# EAGLE board PowerBoard (EAGLE 7.4.0), part 1 of 2
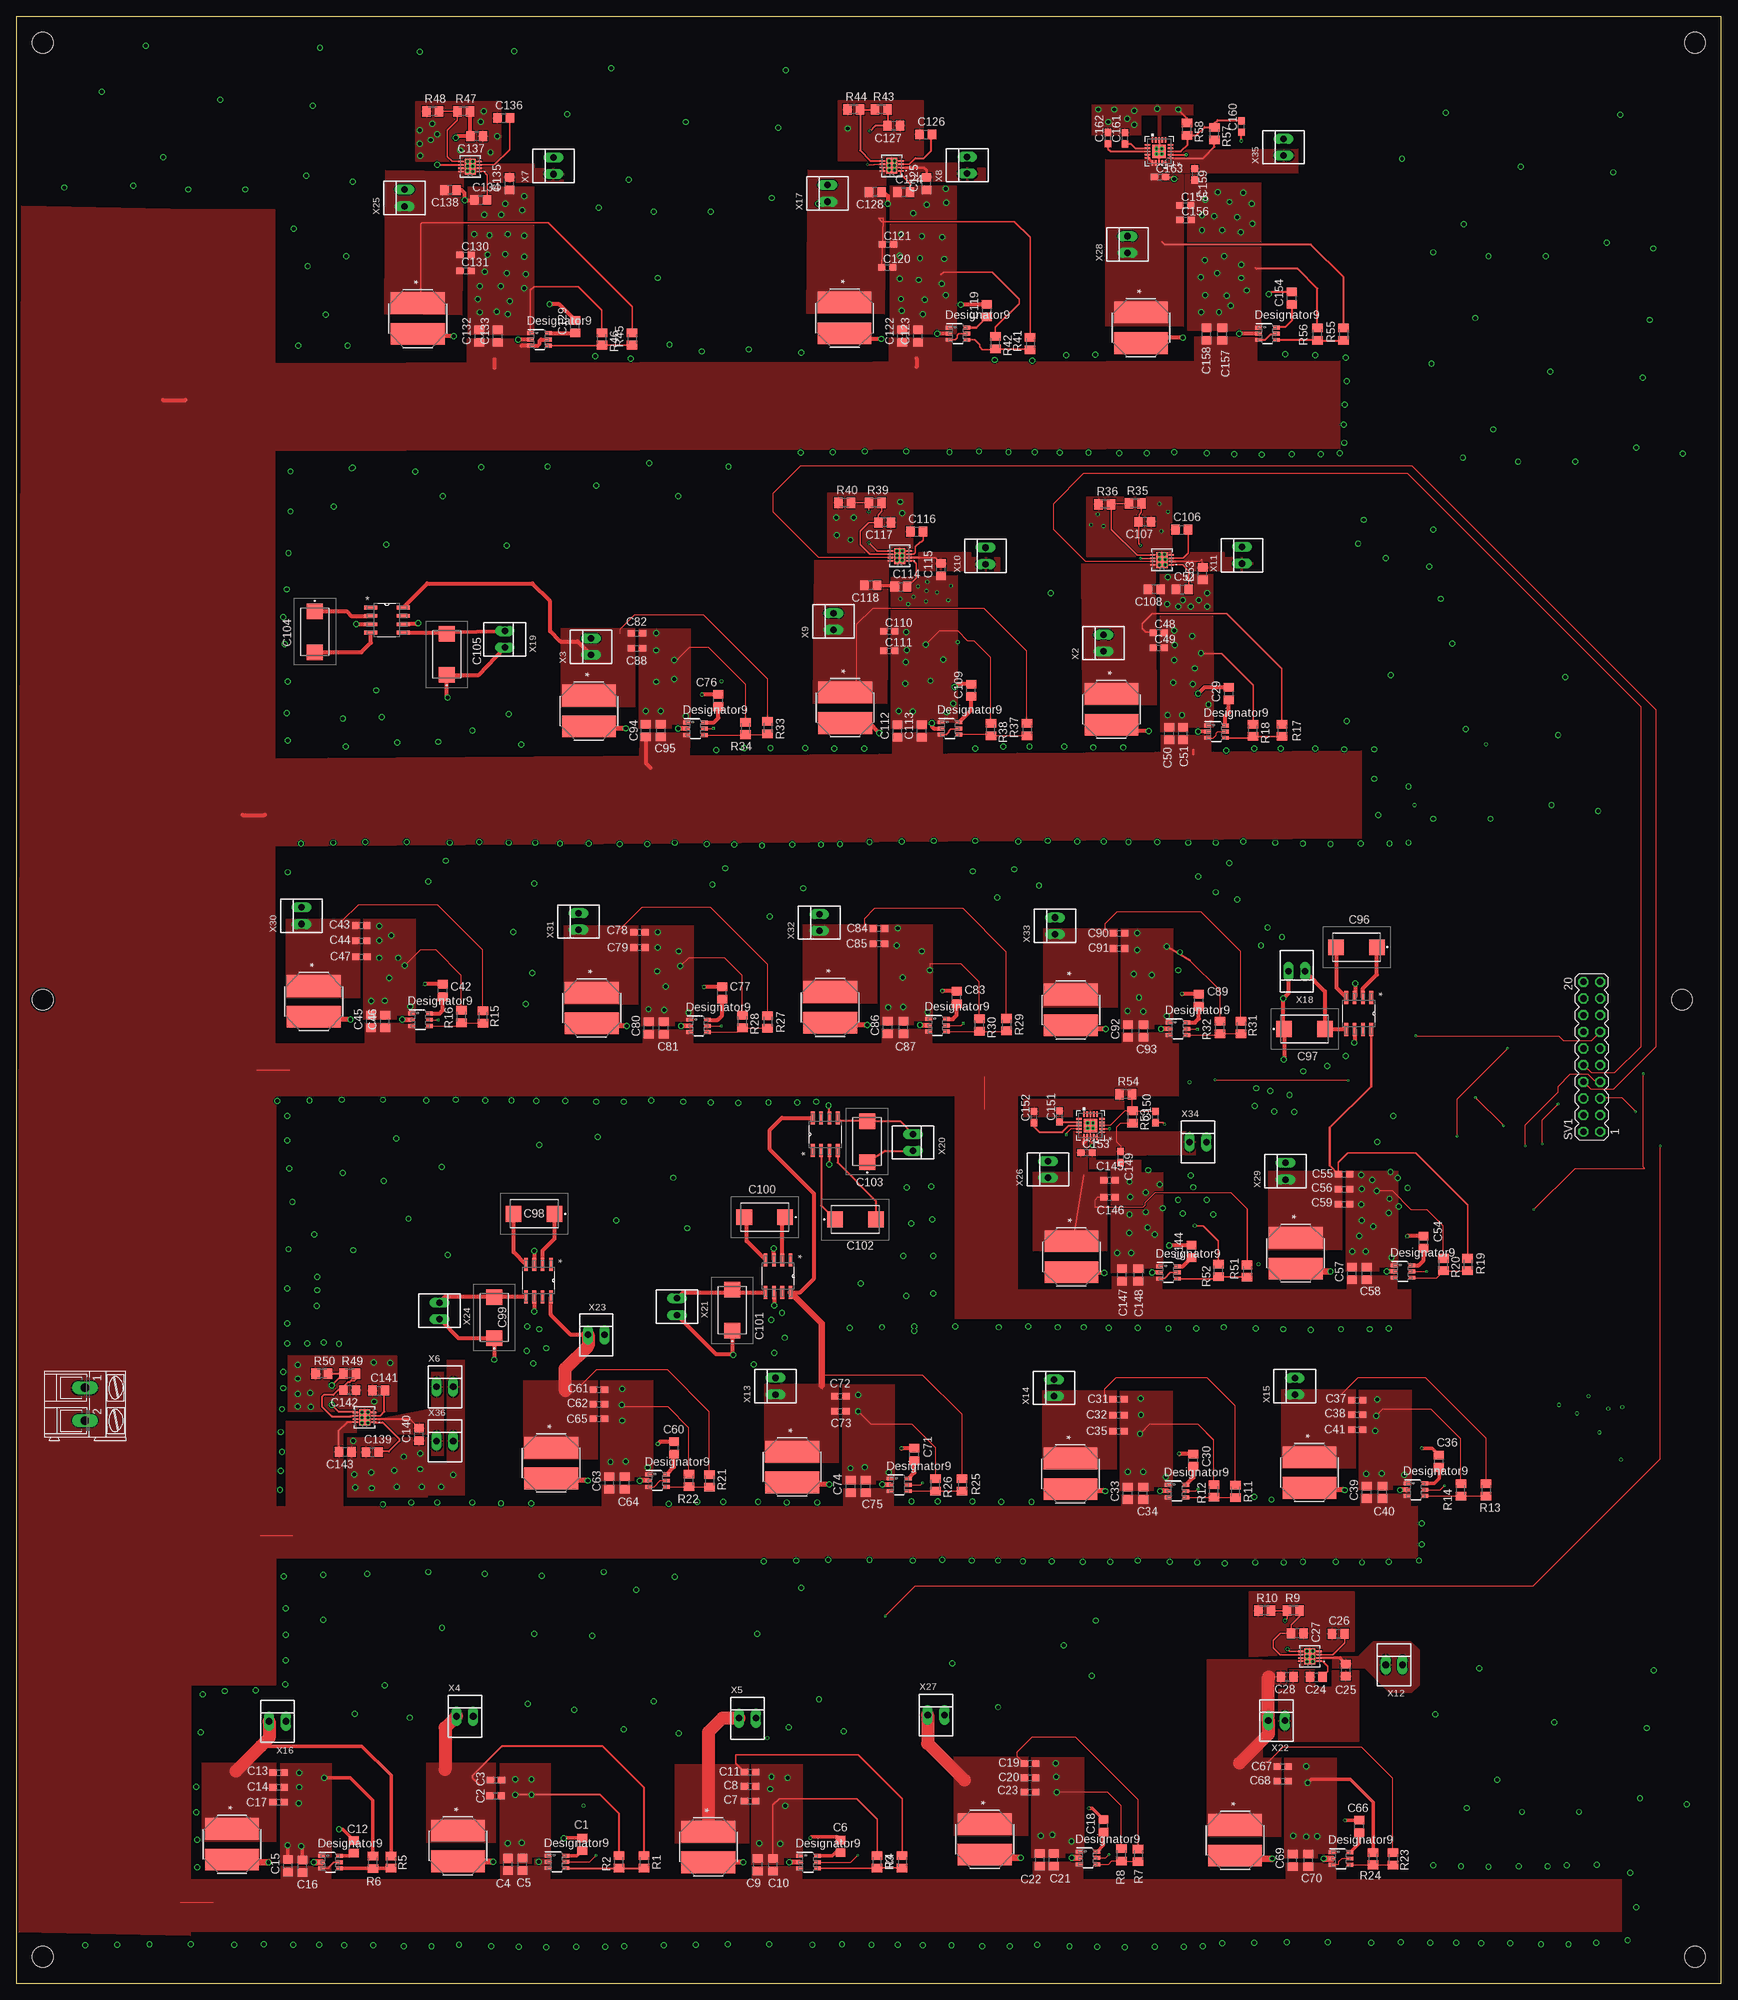
[diagram p0: board, top side]
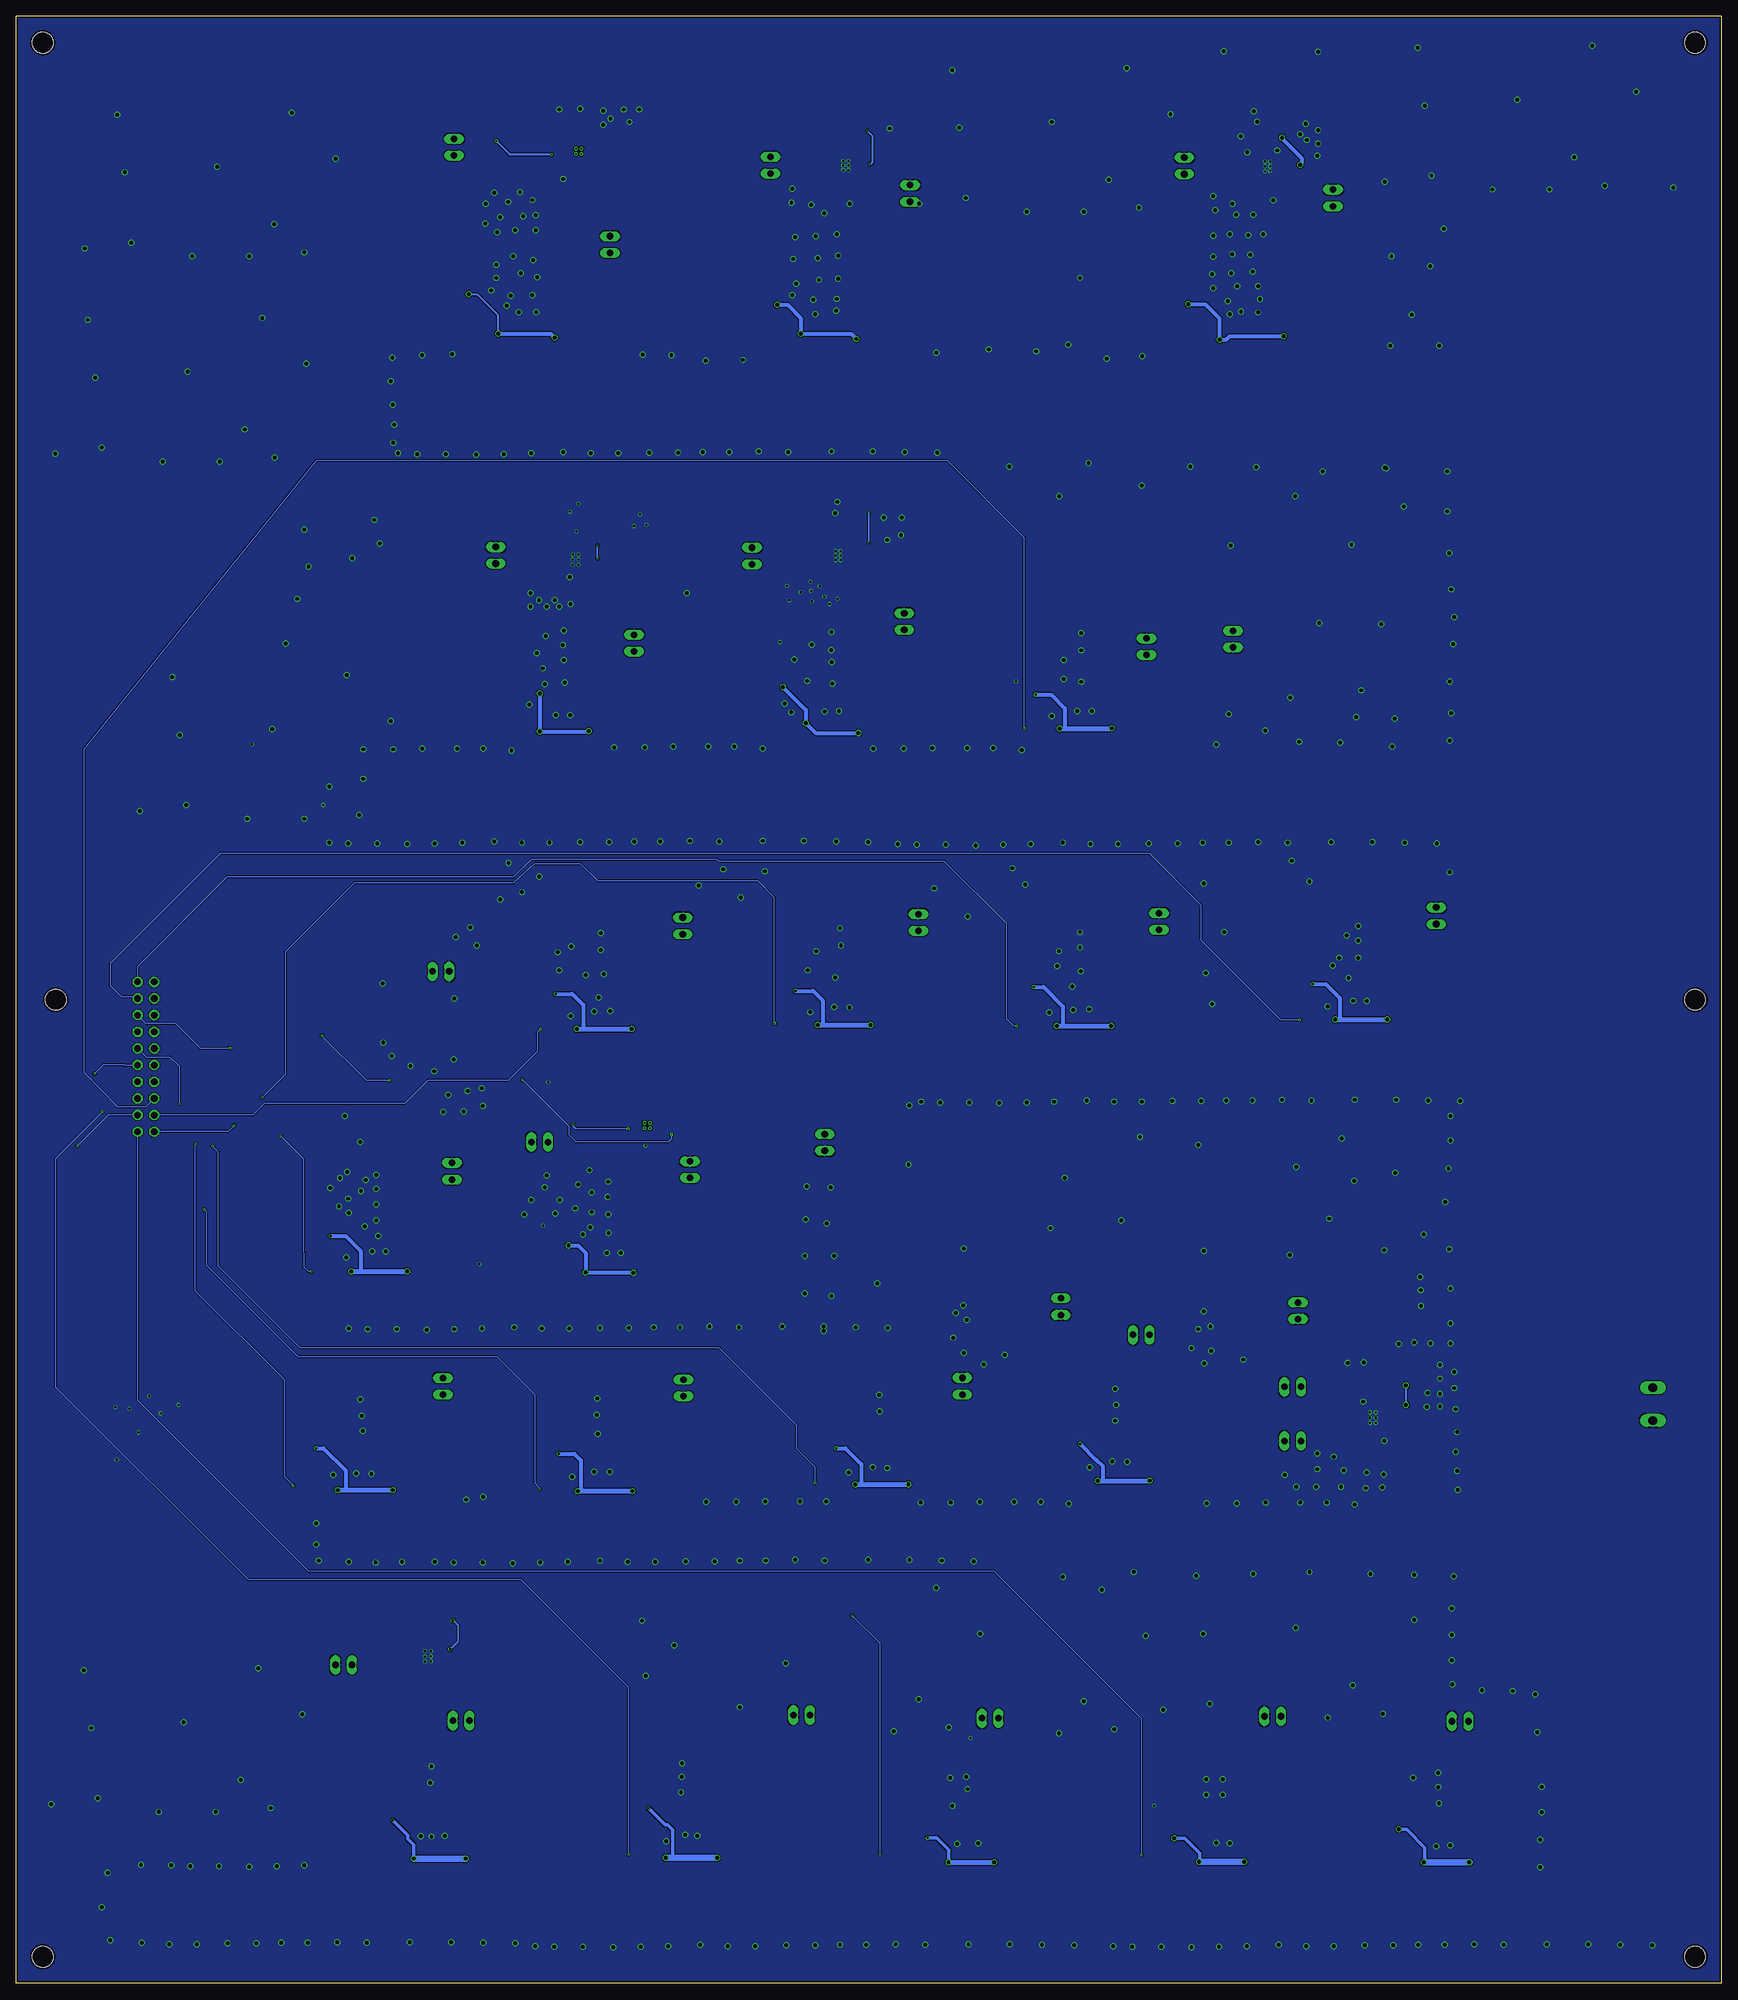
[diagram p1: board, bottom side, seen from below]

Size 260 x 300 mm. Coordinates in mm from the lower left corner, seen from the top.
Outline: 0,0 260,0 260,300 0,300 0,0
Copper layers (1*16): Top 0.035mm / dielectric 1.5mm / Bottom 0.035mm
Design rules "PCBWay_2L_100um-Track *": minimum track width 0.1mm, minimum drill 0.15mm, track to track 0.15mm, track to pad 0.15mm, pad to pad 0.15mm, via to via 0.15mm, smd to smd 0mil, copper to edge 0.3mm, drill to drill 10mil, minimum pad ring 6mil, minimum via ring 0.1mm, stop-mask expansion 2mil, vias tented up to drill 0.45mm, thermal gap 0.2mm
Holes 3.2 mm at 4,4 256,4 256,296 4,296 254,150 4,150

## Footprints (pad centres in the part's own frame; a part is rotated, then mirrored left to right if it is on the bottom)
C0805 = smd 1.3 x 1.5: 1 -0.95,0; 2 0.95,0
C0603 = smd 1.1 x 1: 1 -0.85,0; 2 0.85,0
T521W = smd 2.37 x 2.43: 1 -3.12,0; 2 3.12,0
M0805 = smd 1.3 x 1.6: 1 -0.95,0; 2 0.95,0
MA10-2 = drill 1.016 octagon: 1 -11.43,-1.27; 2 -11.43,1.27; 3 -8.89,-1.27; 4 -8.89,1.27; 5 -6.35,-1.27; 6 -6.35,1.27; 7 -3.81,-1.27; 8 -3.81,1.27; 9 -1.27,-1.27; 10 -1.27,1.27; 11 1.27,-1.27; 12 1.27,1.27; 13 3.81,-1.27; 14 3.81,1.27; 15 6.35,-1.27; 16 6.35,1.27; 17 8.89,-1.27; 18 8.89,1.27; 19 11.43,-1.27; 20 11.43,1.27
DDC0006A_N = smd 1 x 0.6: 1 -1.375,0.95; 2 -1.375,0; 3 -1.375,-0.95; 4 1.375,-0.95; 5 1.375,0; 6 1.375,0.95
CP_8_11_ADI = smd 0.805 x 0.249: 1 -1.402,0.75; 2 -1.402,0.25; 3 -1.402,-0.25; 4 -1.402,-0.75; 5 1.402,-0.75; 6 1.402,-0.25; 7 1.402,0.25; 8 1.402,0.75 | smd 1.7 x 2.44: 9 0,0
M08A = smd 1.981 x 0.559: 1 -2.464,1.905; 2 -2.464,0.635; 3 -2.464,-0.635; 4 -2.464,-1.905; 5 2.464,-1.905; 6 2.464,-0.635; 7 2.464,0.635; 8 2.464,1.905
RGR20_2P05X2P05_TEX = smd 0.85 x 0.28: 1 -1.725,1; 2 -1.725,0.5; 3 -1.725,0; 4 -1.725,-0.5; 5 -1.725,-1; 11 1.725,-1; 12 1.725,-0.5; 13 1.725,0; 14 1.725,0.5; 15 1.725,1 | smd 0.28 x 0.85: 6 -1,-1.725; 7 -0.5,-1.725; 8 0,-1.725; 9 0.5,-1.725; 10 1,-1.725; 16 1,1.725; 17 0.5,1.725; 18 0,1.725; 19 -0.5,1.725; 20 -1,1.725 | smd 2.05 x 2.05: 21 0,0 | drill 0.254 pad 0.508: V -0.406,-0.406; V_1 -0.406,0.406; V_2 0.406,-0.406; V_3 0.406,0.406
IND_VLP8040T-1R0N_TDK = smd 3.302 x 8.204: 1 -2.35,0; 2 2.35,0
AK300/2 = drill 1.321 long: 1 -2.515,0; 2 2.489,0
22-23-2021 = drill 1 long: 1 -1.27,0; 2 1.27,0

## Placement (x,y rotation side)
C1  0.1µF  [C0805]  86.28,21.19 90 top
C2  22µF  [C0603]  73.09,28.57 0 top
C3  22µF  [C0603]  73.14,30.97 0 top
C4  10µF  [C0805]  74.98,18.09 90 top
C5  10µF  [C0805]  77.18,18.14 90 top
C6  0.1µF  [C0805]  125.68,20.87 90 top
C7  22µF  [C0603]  111.89,27.77 0 top
C8  22µF  [C0603]  111.89,30.02 0 top
C9  10µF  [C0805]  113.08,18.04 90 top
C10  10µF  [C0805]  115.38,18.04 90 top
C11  22µF  [C0603]  111.89,32.17 0 top
C12  0.1µF  [C0805]  51.43,20.82 90 top
C13  22µF  [C0603]  39.99,32.12 0 top
C14  22µF  [C0603]  39.99,29.87 0 top
C15  10µF  [C0805]  41.43,17.89 90 top
C16  10µF  [C0805]  43.63,17.84 90 top
C17  22µF  [C0603]  39.99,27.62 0 top
C18  0.1µF  [C0805]  165.78,24.02 90 top
C19  22µF  [C0603]  154.59,33.52 0 top
C20  22µF  [C0603]  154.59,31.32 0 top
C21  10µF  [C0805]  158.18,18.84 90 top
C22  10µF  [C0805]  156.08,18.84 90 top
C23  22µF  [C0603]  154.59,29.12 0 top
C24  10µF  [C0805]  198.2,46.7 0 top
C25  10µF  [C0805]  202.75,47.75 90 top
C26  1µF  [C0805]  201.6,53.3 0 top
C27  1µF  [C0805]  195.35,53.35 180 top
C28  10µF  [C0805]  193.8,46.7 180 top
C29  0.1µF  [C0805]  184.9,196.7 90 top
C30  0.1µF  [C0805]  179.48,79.77 90 top
C31  22µF  [C0603]  168.09,89.07 0 top
C32  22µF  [C0603]  168.09,86.67 0 top
C33  10µF  [C0805]  169.48,74.74 90 top
C34  10µF  [C0805]  171.83,74.74 90 top
C35  22µF  [C0603]  168.09,84.22 0 top
C36  0.1µF  [C0805]  216.93,79.62 90 top
C37  22µF  [C0603]  204.49,88.92 0 top
C38  22µF  [C0603]  204.49,86.72 0 top
C39  10µF  [C0805]  205.93,74.89 90 top
C40  10µF  [C0805]  208.33,74.89 90 top
C41  22µF  [C0603]  204.49,84.42 0 top
C42  0.1µF  [C0805]  65.03,151.42 90 top
C43  22µF  [C0603]  52.59,161.32 0 top
C44  22µF  [C0603]  52.59,158.97 0 top
C45  10µF  [C0805]  54.08,146.69 90 top
C46  10µF  [C0805]  56.23,146.69 90 top
C47  22µF  [C0603]  52.62,156.57 0 top
C48  22µF  [C0603]  174.2,206 0 top
C49  22µF  [C0603]  174.2,203.7 0 top
C50  10µF  [C0805]  175.8,190.6 90 top
C51  10µF  [C0805]  177.9,190.6 90 top
C52  10µF  [C0805]  177.8,212.6 0 top
C53  10µF  [C0805]  180.9,215 90 top
C54  0.1µF  [C0805]  214.58,113.02 90 top
C55  22µF  [C0603]  202.47,123.37 0 top
C56  22µF  [C0603]  202.47,121.12 0 top
C57  10µF  [C0805]  203.68,108.24 90 top
C58  10µF  [C0805]  205.93,108.24 90 top
C59  22µF  [C0603]  202.47,118.82 0 top
C60  0.1µF  [C0805]  100.28,81.62 90 top
C61  22µF  [C0603]  88.82,90.52 0 top
C62  22µF  [C0603]  88.82,88.32 0 top
C63  10µF  [C0805]  90.43,76.29 90 top
C64  10µF  [C0805]  92.78,76.29 90 top
C65  22µF  [C0603]  88.82,86.07 0 top
C66  0.1µF  [C0805]  204.78,23.92 90 top
C67  22µF  [C0603]  193.12,33.02 0 top
C68  22µF  [C0603]  193.12,30.82 0 top
C69  10µF  [C0805]  194.63,18.74 90 top
C70  10µF  [C0805]  197.03,18.74 90 top
C71  0.1µF  [C0805]  136.93,80.62 90 top
C72  22µF  [C0603]  125.67,89.52 0 top
C73  22µF  [C0603]  125.67,87.27 0 top
C74  10µF  [C0805]  127.23,75.79 90 top
C75  10µF  [C0805]  129.53,75.79 90 top
C76  0.1µF  [C0805]  107.03,195.67 90 top
C77  0.1µF  [C0805]  107.63,151.02 90 top
C78  22µF  [C0603]  95.02,160.32 0 top
C79  22µF  [C0603]  95.02,157.97 0 top
C80  10µF  [C0805]  96.43,145.69 90 top
C81  10µF  [C0805]  98.73,145.69 90 top
C82  22µF  [C0603]  94.62,205.87 0 top
C83  0.1µF  [C0805]  143.38,150.37 90 top
C84  22µF  [C0603]  131.52,160.87 0 top
C85  22µF  [C0603]  131.52,158.57 0 top
C86  10µF  [C0805]  132.88,145.79 90 top
C87  10µF  [C0805]  135.28,145.79 90 top
C88  22µF  [C0603]  94.62,203.62 0 top
C89  0.1µF  [C0805]  180.33,149.92 90 top
C90  22µF  [C0603]  168.17,160.12 0 top
C91  22µF  [C0603]  168.17,157.82 0 top
C92  10µF  [C0805]  169.53,145.24 90 top
C93  10µF  [C0805]  171.88,145.24 90 top
C94  10µF  [C0805]  95.98,191.04 90 top
C95  10µF  [C0805]  98.28,191.04 90 top
C96  T521W476M020ATE045  [T521W]  204.37,158.01 180 top
C97  T521W476M020ATE045  [T521W]  196.44,145.54 0 top
C98  T521W476M020ATE045  [T521W]  78.95,117.36 180 top
C99  T521W476M020ATE045  [T521W]  72.88,101.52 90 top
C100  T521W476M020ATE045  [T521W]  114.12,116.83 180 top
C101  T521W476M020ATE045  [T521W]  109.18,102.64 90 top
C102  T521W476M020ATE045  [T521W]  127.95,116.47 0 top
C103  T521W476M020ATE045  [T521W]  129.73,128.36 90 top
C104  T521W476M020ATE045  [T521W]  45.52,206.13 270 top
C105  T521W476M020ATE045  [T521W]  65.63,202.68 90 top
C106  1µF  [C0805]  177.7,221.7 0 top
C107  1µF  [C0805]  172.1,222.9 180 top
C108  10µF  [C0805]  173.5,212.6 180 top
C109  0.1µF  [C0805]  145.6,197.2 90 top
C110  22µF  [C0603]  133.1,206.2 0 top
C111  22µF  [C0603]  133.1,203.2 0 top
C112  10µF  [C0805]  134.38,190.99 90 top
C113  10µF  [C0805]  138.06,190.99 90 top
C114  10µF  [C0805]  134.9,213 0 top
C115  10µF  [C0805]  141,215.6 90 top
C116  1µF  [C0805]  137.3,221.4 0 top
C117  1µF  [C0805]  132.4,222.8 180 top
C118  10µF  [C0805]  130.3,213.2 180 top
C119  0.1µF  [C0805]  148,255.1 90 top
C120  22µF  [C0603]  132.8,261.7 0 top
C121  22µF  [C0603]  132.9,265.2 0 top
C122  10µF  [C0805]  135.1,251.2 90 top
C123  10µF  [C0805]  137.5,251.2 90 top
C124  10µF  [C0805]  135.3,273.2 0 top
C125  10µF  [C0805]  138.8,274.5 90 top
C126  1µF  [C0805]  138.7,282 0 top
C127  1µF  [C0805]  133.8,283.3 180 top
C128  10µF  [C0805]  131,273.2 180 top
C129  0.1µF  [C0805]  85.2,252.7 90 top
C130  22µF  [C0603]  68.5,263.6 0 top
C131  22µF  [C0603]  68.5,261.2 0 top
C132  10µF  [C0805]  70.6,251.2 90 top
C133  10µF  [C0805]  73.4,251.2 90 top
C134  10µF  [C0805]  70.8,272 0 top
C135  10µF  [C0805]  75.2,274.5 90 top
C136  1µF  [C0805]  74.3,284.5 0 top
C137  1µF  [C0805]  70.2,281.7 180 top
C138  10µF  [C0805]  66.2,273.5 180 top
C139  10µF  [C0805]  54.3,81 0 top
C140  10µF  [C0805]  61.4,83.7 90 top
C141  1µF  [C0805]  55.27,90.39 0 top
C142  1µF  [C0805]  50.85,90.45 180 top
C143  10µF  [C0805]  50.18,81.01 180 top
C144  0.1µF  [C0805]  179.2,111.6 90 top
C145  22µF  [C0603]  166.7,122.5 0 top
C146  22µF  [C0603]  166.7,119.9 0 top
C147  10µF  [C0805]  168.6,108 90 top
C148  10µF  [C0805]  171.1,108 90 top
C149  22µF  [C0603]  168.4,126 270 top
C150  10nF  [C0603]  173.7,132.1 90 top
C151  10µF  [C0603]  159.1,132.2 90 top
C152  10nF  [C0603]  155.2,132.1 90 top
C153  10µF  [C0603]  163.2,126.7 0 top
C154  0.1µF  [C0805]  194.5,257 90 top
C155  22µF  [C0603]  178.25,271.15 0 top
C156  22µF  [C0603]  178.3,268.95 0 top
C157  10µF  [C0805]  183.9,251.5 90 top
C158  10µF  [C0805]  181.5,251.5 90 top
C159  22µF  [C0603]  179.7,275.9 270 top
C160  10nF  [C0603]  186.8,283.2 90 top
C161  10µF  [C0603]  169.05,281.4 90 top
C162  10nF  [C0603]  166.45,281.45 90 top
C163  10µF  [C0603]  174.4,275.5 0 top
R1  3.09k  [M0805]  95.73,18.52 90 top
R2  10k  [M0805]  91.92,18.48 270 top
R3  13.7k  [M0805]  135.08,18.52 90 top
R4  10k  [M0805]  131.27,18.51 270 top
R5  32.2k  [M0805]  57.13,18.47 90 top
R6  10k  [M0805]  54.37,18.44 270 top
R7  32.2k  [M0805]  171.08,19.52 90 top
R8  10k  [M0805]  168.52,19.57 270 top
R9  12k  [M0805]  194.75,56.8 0 top
R10  10k  [M0805]  190.35,56.8 0 top
R11  32.2k  [M0805]  185.88,75.02 90 top
R12  10k  [M0805]  182.62,75.07 270 top
R13  32.2k  [M0805]  224.13,75.22 90 top
R14  10k  [M0805]  220.27,75.25 270 top
R15  32.2k  [M0805]  71.13,147.37 90 top
R16  10k  [M0805]  67.87,147.43 270 top
R17  56.2k  [M0805]  193,191.1 90 top
R18  10k  [M0805]  188.6,191.1 270 top
R19  32.2k  [M0805]  221.33,109.59 90 top
R20  10k  [M0805]  217.62,109.59 270 top
R21  34.8k  [M0805]  105.68,76.64 90 top
R22  10k  [M0805]  102.57,76.67 270 top
R23  56.2k  [M0805]  209.93,18.94 90 top
R24  10k  [M0805]  206.92,19 270 top
R25  56.2k  [M0805]  144.23,75.99 90 top
R26  10k  [M0805]  140.17,76.03 270 top
R27  56.2k  [M0805]  114.58,146.64 90 top
R28  10k  [M0805]  110.72,146.71 270 top
R29  56.2k  [M0805]  150.98,146.19 90 top
R30  10k  [M0805]  146.87,146.14 270 top
R31  56.2k  [M0805]  186.73,145.79 90 top
R32  10k  [M0805]  183.57,145.77 270 top
R33  61.9k  [M0805]  114.58,191.49 90 top
R34  10k  [M0805]  111.22,191.4 270 top
R35  12k  [M0805]  170.6,225.7 0 top
R36  10k  [M0805]  166,225.6 0 top
R37  56.2k  [M0805]  154.1,191.2 90 top
R38  10k  [M0805]  148.6,191.2 270 top
R39  2k  [M0805]  131,225.8 0 top
R40  10k  [M0805]  126.3,225.8 0 top
R41  56.2k  [M0805]  154.6,250.1 90 top
R42  10k  [M0805]  149.3,250.2 270 top
R43  12k  [M0805]  131.9,285.8 0 top
R44  10k  [M0805]  127.7,285.8 0 top
R45  56.2k  [M0805]  93.9,250.8 90 top
R46  10k  [M0805]  89.3,250.8 270 top
R47  12k  [M0805]  68.2,285.5 0 top
R48  10k  [M0805]  63.5,285.5 0 top
R49  23.4k  [M0805]  50.85,92.95 0 top
R50  10k  [M0805]  46.6,92.95 0 top
R51  56.2k  [M0805]  187.7,108.6 90 top
R52  10k  [M0805]  183.3,108.7 270 top
R53  35.7k  [M0805]  170.2,132.1 270 top
R54  11.5k  [M0805]  169.2,135.6 0 top
R55  56.2k  [M0805]  202.4,251.5 90 top
R56  10k  [M0805]  198.4,251.5 270 top
R57  35.7k  [M0805]  182.7,282.1 270 top
R58  11.5k  [M0805]  178.5,282.8 270 top
SV1  [MA10-2]  240.25,141.3 90 top
U1  TPS562208DDCT  [DDC0006A_N]  82.42,18.5 0 top
U2  TPS562208DDCT  [DDC0006A_N]  120.79,18.45 0 top
U3  TPS562208DDCT  [DDC0006A_N]  47.91,18.45 0 top
U4  TPS562208DDCT  [DDC0006A_N]  163.43,19.1 0 top
U5  ADM7151ACPZ-04-R7  [CP_8_11_ADI]  197.25,49.85 180 top
U6  TPS562208DDCT  [DDC0006A_N]  176.97,75.05 0 top
U7  TPS562208DDCT  [DDC0006A_N]  213.44,75.25 0 top
U8  TPS562208DDCT  [DDC0006A_N]  61.63,146.95 0 top
U9  TPS562208DDCT  [DDC0006A_N]  183,190.9 0 top
U10  TPS562208DDCT  [DDC0006A_N]  211.47,108.55 0 top
U11  TPS562208DDCT  [DDC0006A_N]  97.79,76.65 0 top
U12  TPS562208DDCT  [DDC0006A_N]  202.01,19 0 top
U13  TPS562208DDCT  [DDC0006A_N]  134.63,76 0 top
U14  TPS562208DDCT  [DDC0006A_N]  104.05,146 0 top
U15  TPS562208DDCT  [DDC0006A_N]  140.47,146.1 0 top
U16  TPS562208DDCT  [DDC0006A_N]  177.14,145.55 0 top
U17  TPS562208DDCT  [DDC0006A_N]  103.58,191.35 0 top
U18  LM2662MX/NOPB  [M08A]  204.7,147.89 270 top
U19  LM2662MX/NOPB  [M08A]  79.6,107.17 270 top
U20  LM2662MX/NOPB  [M08A]  116.15,107.85 270 top
U21  LM2662MX/NOPB  [M08A]  123.34,129.48 90 top
U22  LM2662MX/NOPB  [M08A]  56.5,207.91 0 top
U23  ADM7151ACPZ-04-R7  [CP_8_11_ADI]  174.7,217.1 180 top
U24  TPS562208DDCT  [DDC0006A_N]  142.38,191.37 0 top
U25  ADM7151ACPZ-04-R7  [CP_8_11_ADI]  134.7,217.7 180 top
U26  TPS562208DDCT  [DDC0006A_N]  143.6,251.6 0 top
U27  ADM7151ACPZ-04-R7  [CP_8_11_ADI]  133.5,277.2 180 top
U28  TPS562208DDCT  [DDC0006A_N]  79.8,250.7 0 top
U29  ADM7151ACPZ-04-R7  [CP_8_11_ADI]  69.2,277.1 180 top
U30  ADM7151ACPZ-04-R7  [CP_8_11_ADI]  53.1,86.3 180 top
U31  TPS562208DDCT  [DDC0006A_N]  175.7,108.4 0 top
U32  TPS7A8300RGRR  [RGR20_2P05X2P05_TEX]  163.8,130.8 180 top
U33  TPS562208DDCT  [DDC0006A_N]  190.8,251.6 0 top
U34  TPS7A8300RGRR  [RGR20_2P05X2P05_TEX]  174.25,279.4 180 top
U$1  2.2µH  [IND_VLP8040T-1R0N_TDK]  67.33,20.94 270 top
U$2  2.2µH  [IND_VLP8040T-1R0N_TDK]  105.53,20.79 270 top
U$3  3.3µH  [IND_VLP8040T-1R0N_TDK]  32.88,21.19 270 top
U$4  3.3µH  [IND_VLP8040T-1R0N_TDK]  147.68,21.94 270 top
U$5  3.3µH  [IND_VLP8040T-1R0N_TDK]  167,194.3 270 top
U$6  3.3µH  [IND_VLP8040T-1R0N_TDK]  160.74,77.69 270 top
U$7  3.3µH  [IND_VLP8040T-1R0N_TDK]  197.19,77.89 270 top
U$8  3.3µH  [IND_VLP8040T-1R0N_TDK]  45.34,149.74 270 top
U$9  3.3µH  [IND_VLP8040T-1R0N_TDK]  126.38,194.55 270 top
U$10  3.3µH  [IND_VLP8040T-1R0N_TDK]  195.09,111.34 270 top
U$11  3.3µH  [IND_VLP8040T-1R0N_TDK]  81.55,79.34 270 top
U$12  3.3µH  [IND_VLP8040T-1R0N_TDK]  185.85,21.79 270 top
U$13  3.3µH  [IND_VLP8040T-1R0N_TDK]  118.3,78.74 270 top
U$14  3.3µH  [IND_VLP8040T-1R0N_TDK]  87.75,148.74 270 top
U$15  3.3µH  [IND_VLP8040T-1R0N_TDK]  124.1,148.84 270 top
U$16  3.3µH  [IND_VLP8040T-1R0N_TDK]  160.81,148.44 270 top
U$17  3.3µH  [IND_VLP8040T-1R0N_TDK]  87.31,194.04 270 top
U$18  3.3µH  [IND_VLP8040T-1R0N_TDK]  126.3,254 270 top
U$19  3.3µH  [IND_VLP8040T-1R0N_TDK]  61.2,253.9 270 top
U$20  3.3µH  [IND_VLP8040T-1R0N_TDK]  160.9,110.8 270 top
U$21  3.3µH  [IND_VLP8040T-1R0N_TDK]  171.5,252.5 270 top
X1  [AK300/2]  10.45,88.3 270 top
X2  22-23-2021  [22-23-2021]  165.8,204.4 90 top
X3  22-23-2021  [22-23-2021]  87.65,203.85 90 top
X4  22-23-2021  [22-23-2021]  68.4,40.7 0 top
X5  22-23-2021  [22-23-2021]  111.5,40.4 0 top
X6  22-23-2021  [22-23-2021]  65.35,90.95 0 top
X7  22-23-2021  [22-23-2021]  81.9,277.2 90 top
X8  22-23-2021  [22-23-2021]  145,277.3 90 top
X9  22-23-2021  [22-23-2021]  124.6,207.7 90 top
X10  22-23-2021  [22-23-2021]  147.8,217.7 90 top
X11  22-23-2021  [22-23-2021]  186.9,217.8 90 top
X12  22-23-2021  [22-23-2021]  210.1,48.55 0 top
X13  22-23-2021  [22-23-2021]  115.75,91.05 90 top
X14  22-23-2021  [22-23-2021]  158.26,90.79 90 top
X15  22-23-2021  [22-23-2021]  194.96,91.04 90 top
X16  22-23-2021  [22-23-2021]  39.82,39.93 0 top
X17  22-23-2021  [22-23-2021]  123.7,273 90 top
X18  22-23-2021  [22-23-2021]  195.26,154.32 180 top
X19  22-23-2021  [22-23-2021]  74.48,205 270 top
X20  22-23-2021  [22-23-2021]  136.73,128.24 270 top
X21  22-23-2021  [22-23-2021]  100.73,103.18 270 top
X22  22-23-2021  [22-23-2021]  192.18,40.03 0 top
X23  22-23-2021  [22-23-2021]  88.44,98.88 0 top
X24  22-23-2021  [22-23-2021]  64.53,102.55 270 top
X25  22-23-2021  [22-23-2021]  59.2,272.3 90 top
X26  22-23-2021  [22-23-2021]  157.3,124.1 90 top
X27  22-23-2021  [22-23-2021]  140.25,40.9 0 top
X28  22-23-2021  [22-23-2021]  169.45,265.2 90 top
X29  22-23-2021  [22-23-2021]  193.55,123.85 90 top
X30  22-23-2021  [22-23-2021]  43.47,162.82 90 top
X31  22-23-2021  [22-23-2021]  85.73,161.95 90 top
X32  22-23-2021  [22-23-2021]  122.44,161.78 90 top
X33  22-23-2021  [22-23-2021]  158.38,161.27 90 top
X34  22-23-2021  [22-23-2021]  180.2,128.3 0 top
X35  22-23-2021  [22-23-2021]  193.25,280.05 90 top
X36  22-23-2021  [22-23-2021]  65.35,82.7 0 top

## Library data of the parts
C1-C95 C106-C163 = rcl; SPICEPREFIX: C
C96-C105 = T521W476M020ATE045; DESCRIPTION: T521, Tantalum, Polymer Tantalum, Commercial Grade, 47 uF, 20%, 20 VDC, 105C, -55C, 105C, SMD, Polymer, Molded, Low Profile/ESR, NonCombustible, 2,000 Hrs, 9 % , 45 mOhms, 94 uA, 222.95 mg, 7343, 1.4mm, Height Max = 1.5mm, 1000, 52 Weeks; HEIGHT: 1.5mm; MANUFACTURER_NAME: KEMET; MANUFACTURER_PART_NUMBER: T521W476M020ATE045; MOUSER_PART_NUMBER: 80-T521W476M20ATE045; MOUSER_PRICE-STOCK: https://www.mouser.co.uk/ProductDetail/KEMET/T521W476M020ATE045?qs=Ad%252Bh9aq9FyVtchBw1jwoFA%3D%3D
R1-R58 = rcl; SPICEPREFIX: R
SV1 = con-lstb; OC_FARNELL: unknown; OC_NEWARK: unknown
U1-U4 U6-U17 U24 U26 U28 U31 U33 = My_Library_RADAR; COPYRIGHT: Copyright (C) 2025 Ultra Librarian. All rights reserved.; DATASHEET: https://www.ti.com/lit/gpn/tps562208; DESCRIPTION: 4.5 V to 17 V input, 2 A output, synchronous step-down converter in FCCM mode 6-SOT-23-THIN -40 to 125; MANUFACTURER_NAME: Texas Instruments; MANUFACTURER_PART_NUMBER: TPS562208DDCT; REFDES: RefDes; TYPE: TYPE
U5 U23 U25 U27 U29 U30 = My_Library_RADAR; COPYRIGHT: Copyright (C) 2025 Ultra Librarian. All rights reserved.; DATASHEET: https://www.analog.com/media/en/technical-documentation/data-sheets/ADM7151.pdf; DESCRIPTION: 800 mA Ultralow Noise, High PSRR, RF Linear Regulator; MANUFACTURER_NAME: Analog Devices Inc; MANUFACTURER_PART_NUMBER: ADM7151ACPZ-04-R7
U18-U22 = My_Library; COPYRIGHT: Copyright (C) 2024 Ultra Librarian. All rights reserved.; MANUFACTURER_PART_NUMBER: LM2662MX/NOPB; MFR_NAME: Texas Instruments; TYPE: LM2662M
U32 U34 = My_Library_RADAR; COPYRIGHT: Copyright (C) 2025 Ultra Librarian. All rights reserved.; DATASHEET: https://www.ti.com/lit/gpn/tps7a8300; DESCRIPTION: 2-A, low-VIN, low-2-A, low-VIN, low-noise, ultra-low-dropout voltage regulator with power good wi 20-VQFN -40 to 125; MANUFACTURER_NAME: Texas Instruments; MANUFACTURER_PART_NUMBER: TPS7A8300RGRR
U$1-U$21 = My_Library_RADAR
X1 = con-ptr500; OC_FARNELL: unknown; OC_NEWARK: unknown
X2-X36 = con-molex; MF: MOLEX; MPN: 22-23-2021; OC_FARNELL: 1462926; OC_NEWARK: 25C3832

## Nets
+1V0_FPGA: C2.1 C3.1 R1.2 U$1.1 X4.1
+1V8_CLOCK: C115.2 U25.2 X10.1
+1V8_FPGA: C7.1 C8.1 C11.1 R3.2 U$2.1 X5.1
+3V3: C13.1 C14.1 C17.1 R5.2 U$3.1 X16.1
+3V3_ADAR_12: C31.1 C32.1 C35.1 R11.2 U$6.1 X14.1
+3V3_ADAR_34: C37.1 C38.1 C41.1 R13.2 U$7.1 X15.1
+3V3_ADTR: C149.1 R53.2 U32.1 U32.19 U32.20 X34.1
+3V3_AN: C25.2 U5.2 X12.1
+3V3_CLOCK: C53.2 U23.2 X11.1
+3V3_FPGA: C19.1 C20.1 C23.1 R7.2 U$4.1 X27.1
+3V3_LO_1: C125.2 U27.2 X8.1
+3V3_LO_2: C135.2 U29.2 X7.1
+3V3_SW: C55.1 C56.1 C59.1 R19.2 U18.8 U$10.1 X29.1
+3V3_VDD_SW: C43.1 C44.1 C47.1 R15.2 U$8.1 X30.1
+3V3_XO: C159.1 R57.2 U34.1 U34.19 U34.20 X35.1
+3V4: C61.1 C62.1 C65.1 R21.2 U19.8 U$11.1 X23.1
+5V0_0: C28.2 C67.1 C68.1 R23.2 U5.7 U5.8 U$12.1 X22.1
+5V0_1: C48.1 C49.1 C108.2 R17.2 U23.8 U$5.1 X2.1
+5V0_2: C110.1 C111.1 C118.2 R37.2 U25.8 U$9.1 X9.1
+5V0_3: C120.1 C121.1 C128.2 R41.2 U27.7 U27.8 U$18.1 X17.1
+5V0_4: C130.1 C131.1 C138.2 R45.2 U29.7 U29.8 U$19.1 X25.1
+5V0_5: C155.1 C156.1 C163.1 R55.2 U34.14 U34.15 U34.16 U34.17 U$21.1 X28.1
+5V0_ADAR: C72.1 C73.1 R25.2 U20.8 U21.8 U$13.1 X13.1
+5V0_ADTR: C145.1 C146.1 C153.1 R51.2 U32.15 U32.16 U32.17 U$20.1 X26.1
+5V0_LO: C140.2 U30.2 X6.1 X36.1
+5V0_PA_1: C78.1 C79.1 R27.2 U$14.1 X31.1
+5V0_PA_2: C84.1 C85.1 R29.2 U$15.1 X32.1
+5V0_PA_3: C90.1 C91.1 R31.2 U$16.1 X33.1
+5V5_PA: C82.1 C88.1 R33.2 U22.8 U$17.1 X3.1
-3V3_SW: C97.2 U18.5 X18.1
-3V4: C99.2 U19.5 X24.1
-5V0_ADAR12: C101.2 U20.5 X21.1
-5V0_ADAR34: C103.2 U21.5 X20.1
-5V5_PA: C105.2 U22.5 X19.1
EN_+1V0_FPGA: SV1.1 U1.5
EN_+1V8_CLOCK: SV1.8 U25.7
EN_+1V8_FPGA: SV1.3 U2.5
EN_+3V3_ADAR12: SV1.9 U6.5
EN_+3V3_ADAR34: SV1.11 U7.5
EN_+3V3_ADTR: SV1.13 U32.14
EN_+3V3_CLOCK: SV1.10 U23.7
EN_+3V3_FPGA: SV1.5 U4.5
EN_+3V3_SW: SV1.15 U10.5
EN_+3V3_VDD_SW: SV1.17 U8.5
EN_+5V0_ADAR: SV1.7 U13.5
EN_+5V0_PA1: SV1.19 U14.5
EN_+5V0_PA2: SV1.2 U15.5
EN_+5V0_PA3: SV1.4 U16.5
EN_+5V5_PA: SV1.6 U17.5
GND: C2.2 C3.2 C4.2 C5.2 C7.2 C8.2 C9.2 C10.2 C11.2 C13.2 C14.2 C15.2 C16.2 C17.2 C19.2 C20.2 C21.2 C22.2 C23.2 C24.1 C25.1 C26.1 C27.1 C28.1 C31.2 C32.2 C33.2 C34.2 C35.2 C37.2 C38.2 C39.2 C40.2 C41.2 C43.2 C44.2 C45.2 C46.2 C47.2 C48.2 C49.2 C50.2 C51.2 C52.1 C53.1 C55.2 C56.2 C57.2 C58.2 C59.2 C61.2 C62.2 C63.2 C64.2 C65.2 C67.2 C68.2 C69.2 C70.2 C72.2 C73.2 C74.2 C75.2 C78.2 C79.2 C80.2 C81.2 C82.2 C84.2 C85.2 C86.2 C87.2 C88.2 C90.2 C91.2 C92.2 C93.2 C94.2 C95.2 C97.1 C99.1 C101.1 C103.1 C105.1 C106.1 C107.1 C108.1 C110.2 C111.2 C112.2 C113.2 C114.1 C115.1 C116.1 C117.1 C118.1 C120.2 C121.2 C122.2 C123.2 C124.1 C125.1 C126.1 C127.1 C128.1 C130.2 C131.2 C132.2 C133.2 C134.1 C135.1 C136.1 C137.1 C138.1 C139.1 C140.1 C141.1 C142.1 C143.1 C145.2 C146.2 C147.2 C148.2 C149.2 C151.2 C152.2 C153.2 C155.2 C156.2 C157.2 C158.2 C159.2 C161.2 C162.2 C163.2 R2.1 R4.1 R6.1 R8.1 R10.1 R12.1 R14.1 R16.1 R18.1 R20.1 R22.1 R24.1 R26.1 R28.1 R30.1 R32.1 R34.1 R36.1 R38.1 R40.1 R42.1 R44.1 R46.1 R48.1 R50.1 R52.1 R54.1 R56.1 R58.1 SV1.12 SV1.14 SV1.16 SV1.18 SV1.20 U1.1 U2.1 U3.1 U4.1 U5.4 U5.9 U6.1 U7.1 U8.1 U9.1 U10.1 U11.1 U12.1 U13.1 U14.1 U15.1 U16.1 U17.1 U18.3 U18.6 U19.3 U19.6 U20.3 U20.6 U21.3 U21.6 U22.3 U22.6 U23.4 U23.9 U24.1 U25.4 U25.9 U26.1 U27.4 U27.9 U28.1 U29.4 U29.9 U30.4 U30.9 U31.1 U32.8 U32.18 U32.21 U33.1 U34.8 U34.18 U34.21 X1.2 X2.2 X3.2 X4.2 X5.2 X6.2 X7.2 X8.2 X9.2 X10.2 X11.2 X12.2 X13.2 X14.2 X15.2 X16.2 X17.2 X18.2 X19.2 X20.2 X21.2 X22.2 X23.2 X24.2 X25.2 X26.2 X27.2 X28.2 X29.2 X30.2 X31.2 X32.2 X33.2 X34.2 X35.2 X36.2
N$1: C1.2 U1.2 U$1.2
N$2: C1.1 U1.6
N$3: C6.2 U2.2 U$2.2
N$4: R1.1 R2.2 U1.4
N$5: C6.1 U2.6
N$6: R3.1 R4.2 U2.4
N$7: C12.2 U3.2 U$3.2
N$8: C12.1 U3.6
N$9: R5.1 R6.2 U3.4
N$10: C18.2 U4.2 U$4.2
N$11: C18.1 U4.6
N$12: R7.1 R8.2 U4.4
N$13: C24.2 U5.1
N$14: C139.2 U30.1
N$15: C26.2 U5.3
N$16: C30.2 U6.2 U$6.2
N$17: C30.1 U6.6
N$18: R11.1 R12.2 U6.4
N$19: C36.2 U7.2 U$7.2
N$20: C36.1 U7.6
N$21: R13.1 R14.2 U7.4
N$22: C42.2 U8.2 U$8.2
N$23: C42.1 U8.6
N$24: R15.1 R16.2 U8.4
N$25: R9.1 R10.2 U5.5
N$26: C29.2 U9.2 U$5.2
N$27: C27.2 R9.2 U5.6
N$28: C54.2 U10.2 U$10.2
N$29: C54.1 U10.6
N$30: R19.1 R20.2 U10.4
N$31: C60.2 U11.2 U$11.2
N$32: C60.1 U11.6
N$33: R21.1 R22.2 U11.4
N$34: C66.2 U12.2 U$12.2
N$35: C66.1 U12.6
N$36: R23.1 R24.2 U12.4
N$37: C71.2 U13.2 U$13.2
N$38: C71.1 U13.6
N$39: R25.1 R26.2 U13.4
N$40: C77.2 U14.2 U$14.2
N$41: C77.1 U14.6
N$42: R27.1 R28.2 U14.4
N$43: C83.2 U15.2 U$15.2
N$44: C83.1 U15.6
N$45: R29.1 R30.2 U15.4
N$46: C89.2 U16.2 U$16.2
N$47: C89.1 U16.6
N$48: R31.1 R32.2 U16.4
N$49: C76.2 U17.2 U$17.2
N$50: C76.1 U17.6
N$51: R33.1 R34.2 U17.4
N$52: C98.1 U19.2
N$53: C98.2 U19.4
N$54: C96.1 U18.2
N$55: C96.2 U18.4
N$56: C100.1 U20.2
N$57: C100.2 U20.4
N$58: C102.1 U21.2
N$59: C102.2 U21.4
N$60: C104.1 U22.2
N$61: C104.2 U22.4
N$62: C141.2 U30.3
N$63: R49.1 R50.2 U30.5
N$64: C29.1 U9.6
N$65: R17.1 R18.2 U9.4
N$66: C52.2 U23.1
N$67: C142.2 R49.2 U30.6
N$68: C106.2 U23.3
N$69: R35.1 R36.2 U23.5
N$70: C107.2 R35.2 U23.6
N$71: C144.2 U31.2 U$20.2
N$72: C144.1 U31.6
N$73: C109.2 U24.2 U$9.2
N$74: C109.1 U24.6
N$75: R37.1 R38.2 U24.4
N$76: C114.2 U25.1
N$77: R51.1 R52.2 U31.4
N$78: C116.2 U25.3
N$79: R39.1 R40.2 U25.5
N$80: C117.2 R39.2 U25.6
N$81: C154.2 U33.2 U$21.2
N$82: C150.1 U32.2
N$83: C119.2 U26.2 U$18.2
N$84: C119.1 U26.6
N$85: R41.1 R42.2 U26.4
N$86: C124.2 U27.1
N$87: C154.1 U33.6
N$88: C126.2 U27.3
N$89: R43.1 R44.2 U27.5
N$90: C127.2 R43.2 U27.6
N$91: C150.2 R53.1 R54.2 U32.3
N$92: C151.1 U32.12
N$93: C129.2 U28.2 U$19.2
N$94: C129.1 U28.6
N$95: R45.1 R46.2 U28.4
N$96: C134.2 U29.1
N$97: R55.1 R56.2 U33.4
N$98: C136.2 U29.3
N$99: R47.1 R48.2 U29.5
N$100: C137.2 R47.2 U29.6
N$101: C152.1 U32.13
N$102: C160.1 U34.2
N$103: C160.2 R57.1 R58.2 U34.3
N$104: C161.1 U34.12
N$105: C162.1 U34.13
VIN: C4.1 C5.1 C9.1 C10.1 C15.1 C16.1 C21.1 C22.1 C33.1 C34.1 C39.1 C40.1 C45.1 C46.1 C50.1 C51.1 C57.1 C58.1 C63.1 C64.1 C69.1 C70.1 C74.1 C75.1 C80.1 C81.1 C86.1 C87.1 C92.1 C93.1 C94.1 C95.1 C112.1 C113.1 C122.1 C123.1 C132.1 C133.1 C143.2 C147.1 C148.1 C157.1 C158.1 U1.3 U2.3 U3.3 U3.5 U4.3 U6.3 U7.3 U8.3 U9.3 U9.5 U10.3 U11.3 U11.5 U12.3 U12.5 U13.3 U14.3 U15.3 U16.3 U17.3 U24.3 U24.5 U26.3 U26.5 U28.3 U28.5 U30.7 U30.8 U31.3 U31.5 U33.3 U33.5 X1.1